# Altium PCB 显示部分.PcbDoc
Units mil, origin at the board's own origin, x right, y up, seen from the top; angles counter-clockwise.
Board outline 6000 x 4000 mil, 2 copper layers (Top Layer, Bottom Layer); 24 components, 45 nets, 175 pads, 41 vias.
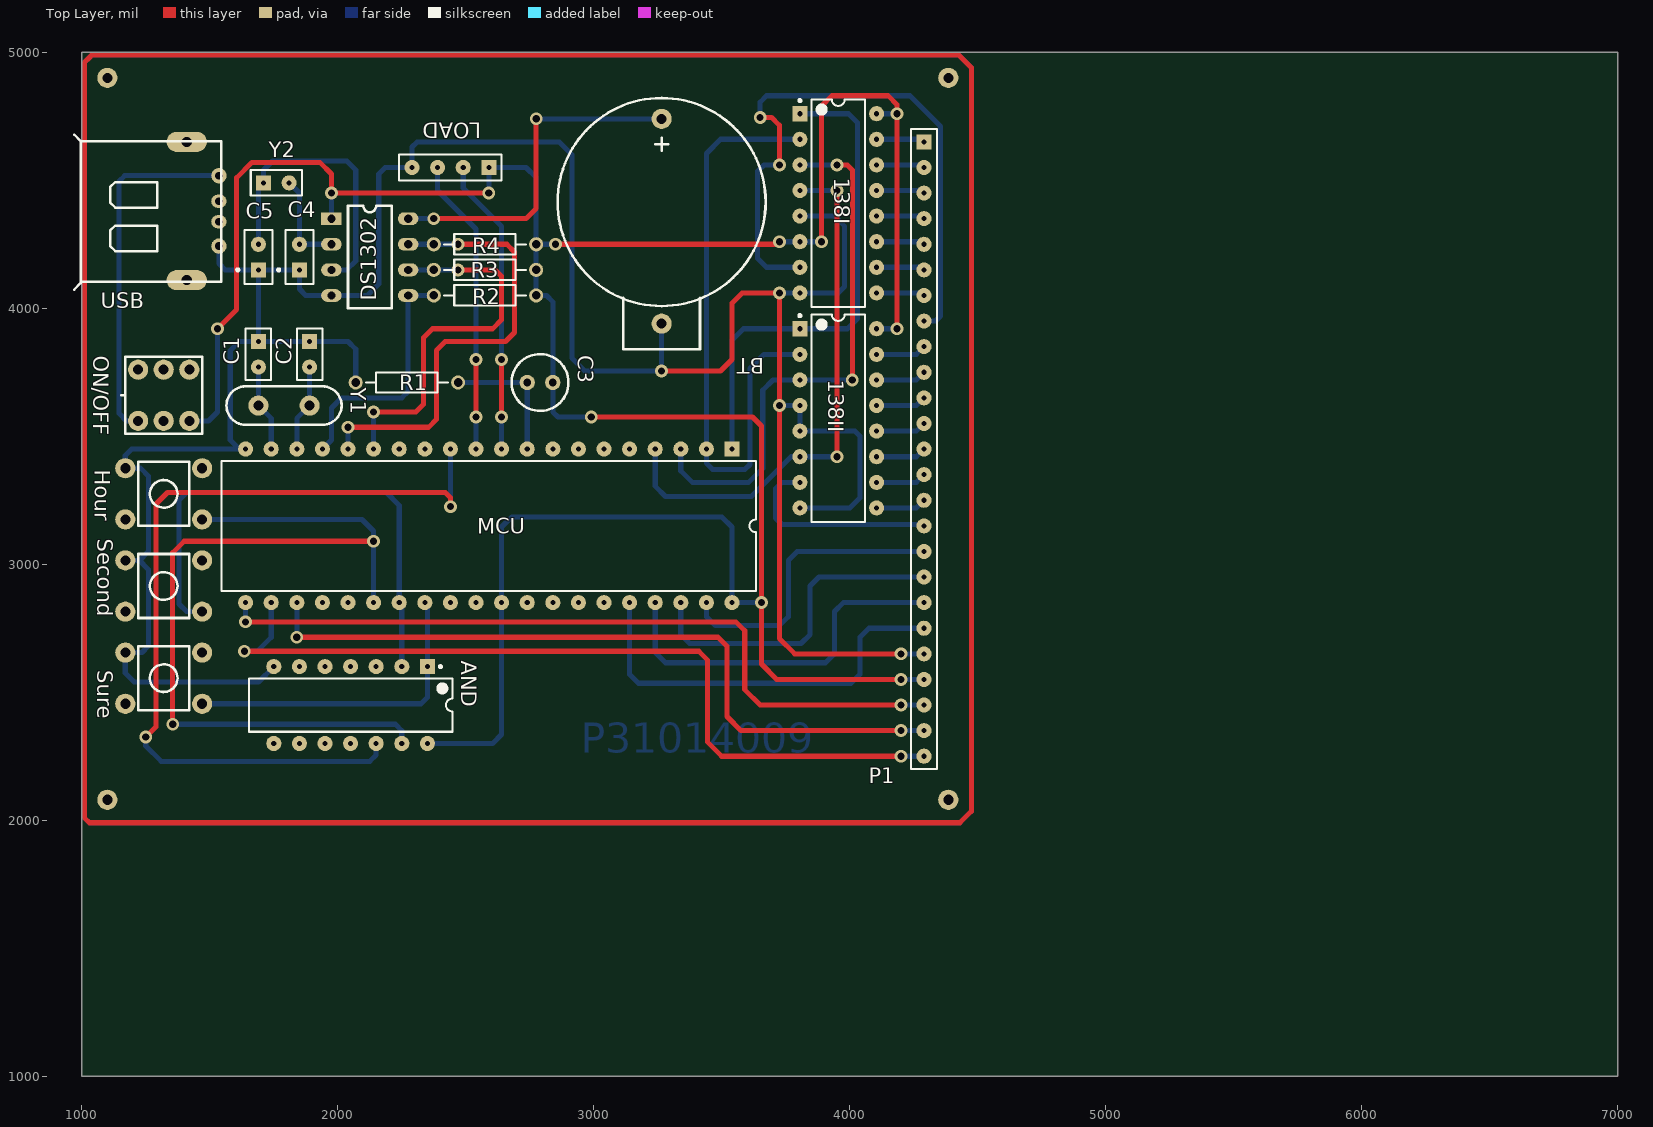
[diagram p0: Top Layer view]
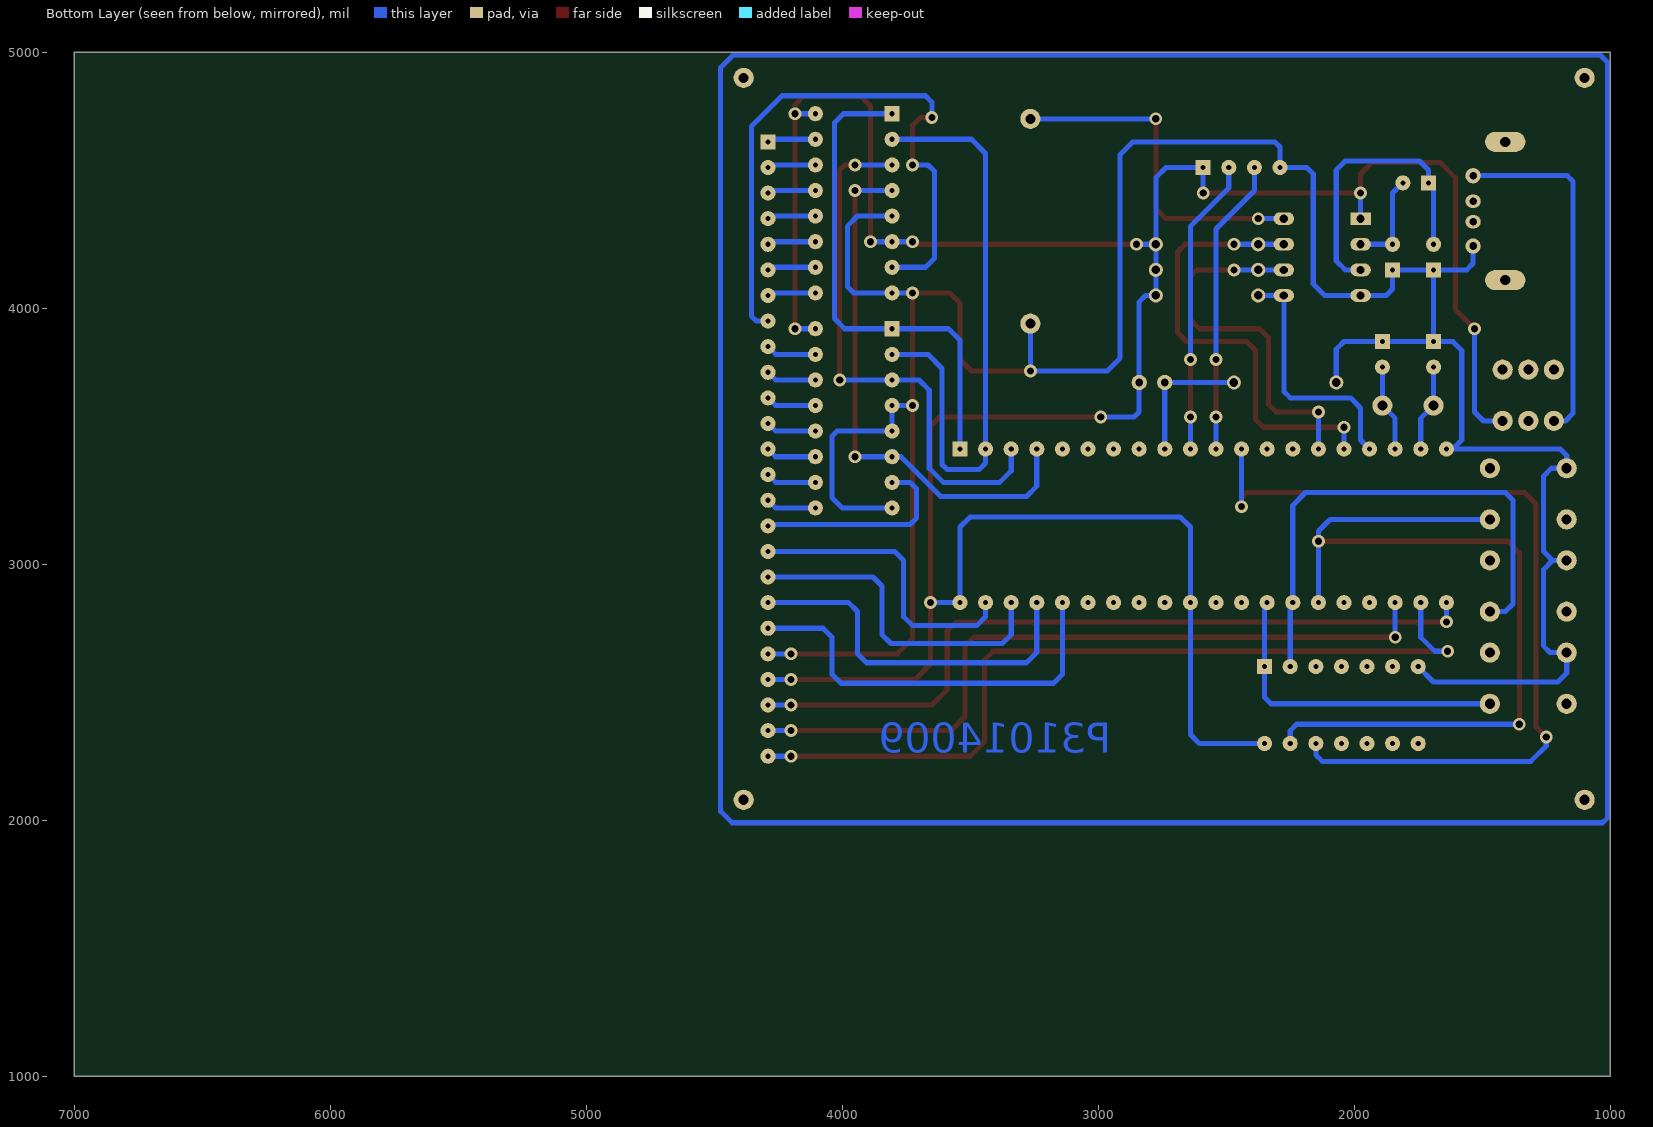
[diagram p1: Bottom Layer view, seen from below]

## Layer stack, top to bottom
Top Layer: signal copper 1.4
Dielectric: dielectric 12.6, FR-4, Dk 4.8
Bottom Layer: signal copper 1.4

## Board outline
1000,1000 7000,1000 7000,5000 1000,5000

## Design rules (kind name [scope] priority, off if disabled: settings)
Clearance [All] p1: gap=10
PolygonConnect [All] p1: connectstyle=Relief reliefconductorwidth=10 reliefentries=4 polygonreliefangle="90 Angle"
RoutingVias [All] p1: holewidth=28 width=50 viastyle="Through Hole" minholewidth=28 minwidth=50 maxholewidth=28 maxwidth=50
SilkscreenOverComponentPads [All] p1: minsilkscreentomaskgap=10
SolderMaskExpansion [All] p1: expansion=4
Width [All] p1: maxlimit=20 minlimit=20 preferedwidth=20 minimp=50.000000 maximp=50.000000 favimp=50.000000
27 further rules are at their usual default settings.

## Components (designator, comment, footprint, x,y, rotation, side; value= is the part's Value field where it differs from the comment)
138I "74ALS138" DIP-16 3955,4410 r0 top
138II "74ALS138" DIP-16 3955,3570 r0 top
AND "74LS11" DIP-14 2050,2450 r270 top
BT "" PCBComponent_1#1 3090,4990 r270 top
C1 "Cap" HDR1X2 1690,3870 r270 top
C2 "Cap" HDR1X2 1890,3870 r270 top
C3 "Cap Pol1" LED 2790,3710 r270 top
C4 "Cap" PIN2 1850,4150 r90 top
C5 "Cap" PIN2 1690,4150 r90 top
DS1302 "" DIP8 1975,4350 r0 top
Hour "" PCBComponent_1#2 2070,3550 r180 top
LOAD "Header 4" HDR1X4 2590,4550 r180 top
MCU "P80C31SBPN" SOT129-1 2590,3150 r180 top
ON/OFF "" PCBComponent_1#3 670,4210 r0 top
P1 "" HDR1X25 4290,4650 r270 top
R1 "Res2" AXIAL-0.4 2270,3710 r0 top
R2 "Res2" AXIAL-0.4 2575,4050 r180 top
R3 "Res2" AXIAL-0.4 2575,4150 r180 top
R4 "Res2" AXIAL-0.4 2575,4250 r180 top
Second "" PCBComponent_1#2 2070,3190 r180 top
Sure "" PCBComponent_1#2 2070,2830 r180 top
USB "USB_M" USB 1250,4370 r180 top
Y1 "XTAL" PCBComponent_1#4 1590,3970 r270 top
Y2 "XTAL" HDR1X2 1710,4490 r0 top

## Footprints (in the part's own frame and the unit in brackets; to place one, negate y for a bottom-side part, rotate by r counter-clockwise, add the part's x,y. Pads: shape width x height; smd on the part's side, far side on the other; paste and mask are expansions set on the pad)
AXIAL-0.4 [mm] "Axial Device, Thru-Hole; 2 Leads; 0.4 in Pin Spacing"
  round 1.4 hole 0.85: 1(-5.08,0) 2(5.08,0)
  silkscreen extent -4.06,-1.02 4.06,1.02
DIP8 [mil]
  rect 80x50 hole 32: 1(0,0)
  oval 80x50 hole 32: 2(0,-100) 3(0,-200) 4(0,-300) 5(300,-300) 6(300,-200) 7(300,-100) 8(300,0)
  silkscreen extent 65,-350 235,50
DIP-14 [mm] "DIP; 14 Leads; Row Spacing 7.62 mm; Pitch 2.54 mm"
  rect 1.5x1.5 hole 0.508: 1(-3.81,7.62)
  round 1.5 hole 0.508: 2(-3.81,5.08) 3(-3.81,2.54) 4(-3.81,0) 5(-3.81,-2.54) 6(-3.81,-5.08) 7(-3.81,-7.62) 8(3.81,-7.62) 9(3.81,-5.08) 10(3.81,-2.54) 11(3.81,0) 12(3.81,2.54) 13(3.81,5.08) 14(3.81,7.62)
  silkscreen extent -3.93,-10.1 2.65,10.1, body extent -3.6,-10.1 3.6,10.1, height 5.08
DIP-16 [mm] "DIP; 16 Leads; Row Spacing 7.62 mm; Pitch 2.54 mm"
  rect 1.5x1.5 hole 0.508: 1(-3.81,8.89)
  round 1.5 hole 0.508: 2(-3.81,6.35) 3(-3.81,3.81) 4(-3.81,1.27) 5(-3.81,-1.27) 6(-3.81,-3.81) 7(-3.81,-6.35) 8(-3.81,-8.89) 9(3.81,-8.89) 10(3.81,-6.35) 11(3.81,-3.81) 12(3.81,-1.27) 13(3.81,1.27) 14(3.81,3.81) 15(3.81,6.35) 16(3.81,8.89)
  silkscreen extent -3.93,-10.3 2.65,10.31, body extent -3.6,-10.28 3.6,10.28, height 5.08
HDR1X2 [mm] "Connector; Header; 2 Position"
  rect 1.5x1.5 hole 0.508: 1(0,0)
  round 1.5 hole 0.508: 2(2.54,0)
  silkscreen extent -1.27,-1.27 3.81,1.27
HDR1X4 [mm] "Connector; Header; 4 Position"
  rect 1.5x1.5 hole 0.508: 1(0,0)
  round 1.5 hole 0.508: 2(2.54,0) 3(5.08,0) 4(7.62,0)
  silkscreen extent -1.27,-1.27 8.89,1.27
HDR1X25 [mm] "Connector; Header; 25 Position"
  rect 1.5x1.5 hole 0.508: 1(0,0)
  round 1.5 hole 0.508: 2(2.54,0) 3(5.08,0) 4(7.62,0) 5(10.16,0) 6(12.7,0) 7(15.24,0) 8(17.78,0) 9(20.32,0) 10(22.86,0) 11(25.4,0) 12(27.94,0) 13(30.48,0) 14(33.02,0) 15(35.56,0) 16(38.1,0) 17(40.64,0) 18(43.18,0) 19(45.72,0) 20(48.26,0) 21(50.8,0) 22(53.34,0) 23(55.88,0) 24(58.42,0) 25(60.96,0)
  silkscreen extent -1.27,-1.27 62.23,1.27
LED [mil]
  round 60 hole 30: 1(0,50) 2(0,-50)
  silkscreen extent -111,-111 111,111
PCBComponent_1#1 [mm]
  round 2 hole 1: 1(6.35,4.445) 2(26.67,4.445)
  silkscreen extent 4.28,-5.88 29.21,14.77
PCBComponent_1#2 [mm]
  round 2 hole 1: 1(15.24,9.525) 2(15.24,4.445) 3(22.86,4.445) 4(22.86,9.525)
  silkscreen extent 16.51,3.81 21.59,10.16
PCBComponent_1#3 [mm]
  round 2 hole 1: 1(13.97,-16.51) 2(16.51,-16.51) 3(19.05,-16.51) 4(19.05,-11.43) 5(16.51,-11.43) 6(13.97,-11.43)
  silkscreen extent 12.32,-17.78 20.32,-10.16
PCBComponent_1#4 [mm]
  round 2 hole 1: 1(8.89,7.62) 2(8.89,2.54)
  silkscreen extent 6.98,-0.63 10.79,10.8
PIN2 [mm] "Photosensitive Diode; 2 Leads"
  rect 1.5x1.5 hole 0.508: 1(0,0)
  round 1.5 hole 0.508: 2(2.54,0)
  silkscreen extent -1.4,-1.4 3.94,2.17
SOT129-1 [mm] "DIP, Plastic; 40 Leads; Row Spacing 15.24 mm; Pitch 2.54 mm"
  rect 1.5x1.5 hole 0.508: 1(-24.13,-7.62)
  round 1.5 hole 0.508: 2(-21.59,-7.62) 3(-19.05,-7.62) 4(-16.51,-7.62) 5(-13.97,-7.62) 6(-11.43,-7.62) 7(-8.89,-7.62) 8(-6.35,-7.62) 9(-3.81,-7.62) 10(-1.27,-7.62) 11(1.27,-7.62) 12(3.81,-7.62) 13(6.35,-7.62) 14(8.89,-7.62) 15(11.43,-7.62) 16(13.97,-7.62) 17(16.51,-7.62) 18(19.05,-7.62) 19(21.59,-7.62) 20(24.13,-7.62) 21(24.13,7.62) 22(21.59,7.62) 23(19.05,7.62) 24(16.51,7.62) 25(13.97,7.62) 26(11.43,7.62) 27(8.89,7.62) 28(6.35,7.62) 29(3.81,7.62) 30(1.27,7.62) 31(-1.27,7.62) 32(-3.81,7.62) 33(-6.35,7.62) 34(-8.89,7.62) 35(-11.43,7.62) 36(-13.97,7.62) 37(-16.51,7.62) 38(-19.05,7.62) 39(-21.59,7.62) 40(-24.13,7.62)
  silkscreen extent -26.5,-6.45 26.5,6.45
USB [mil]
  round 60 hole 30: 1(-285.63,-147.91) 4(-285.63,127.09)
  oval 60x52.13 hole 30: 2(-285.63,-47.91) 3(-285.63,32.09)
  oval 157.48x78.74 hole 39.37: ""(-160,260) ""(-160,-280)
  silkscreen extent -296,-308 279,297

## Part data
BT: library part 干电池, "Battery"
C1 C2 C4 C5: "Capacitor"
C3: "Polarized Capacitor (Radial)"
DS1302 Hour Second Sure: library part Component_1
LOAD: "Header, 4-Pin"
MCU: "80C51 8-Bit Microcontroller Family: 128 B RAM, ROMless, 2.7 V-5.5 V, Low Power, High Speed"
ON/OFF: library part 复位开关
P1: library part "Header 25", "Header, 25-Pin"
R1 R2 R3 R4: "Resistor"
Y1 Y2: "Crystal Oscillator"

## Free pads (board coordinates)
  round 78.74 hole 39.37: 1(1100,4900) 3(1100,2080) 4(4385,2080) 5(4385,4900)

## Via types
v1: diameter 50, hole 28, Top Layer to Bottom Layer, 41 vias

## Nets (pads, with @x,y where several pads share a name; then routed paths per layer and width w, separated by ;. In a path a pad name is that pad's centre, name@x,y a point inside that pad or via, vN(x,y) a via of type N, cw(c..) or ccw(c..) an arc to the next point about the centre after c; other vN are vias at no path point)
A: 138I.1 138II.1 MCU.1 | length 1954.7
  Bottom Layer w20: MCU.1 3540,3875 3585,3920 138II.1 3990,3920 4030,3960 4030,4725 3995,4760 138I.1
B: 138I.2 138II.2 MCU.2 | length 2379.2
  Bottom Layer w20: 138II.2 3665,3820 3610,3765 3610,3390 3590,3370 3465,3370 3440,3395 MCU.2 3440,4605 3495,4660 138I.2
B0: 138I.15 P1.1 | length 175
  Bottom Layer w20: 138I.15 P1.1@4280,4660
B1: 138I.14 P1.2 | length 175
  Bottom Layer w20: 138I.14 P1.2@4280,4560
B2: 138I.13 P1.3 | length 175
  Bottom Layer w20: 138I.13 P1.3@4280,4460
B3: 138I.12 P1.4 | length 175
  Bottom Layer w20: 138I.12 P1.4@4280,4360
B4: 138I.11 P1.5 | length 175
  Bottom Layer w20: 138I.11 P1.5@4280,4260
B5: 138I.10 P1.6 | length 175
  Bottom Layer w20: 138I.10 P1.6@4280,4160
B6: 138I.9 P1.7 | length 175
  Bottom Layer w20: 138I.9 P1.7@4280,4060
B7: 138I.7 P1.8 | length 2497.7
  Top Layer w20: v1(3650,4745) 3695,4745 3725,4715 v1(3725,4560)
  Bottom Layer w20: v1(3650,4745) 3650,4805 3675,4830 4235,4830 4355,4710 4355,3970 4335,3950 P1.8 ; v1@3725,4565 3720,4560 3665,4560 3640,4535 3640,4195 3675,4160 138I.7
B8: 138II.15 P1.9 | length 197.4
  Bottom Layer w20: 138II.15 4260,3820 P1.9
B9: 138II.14 P1.10 | length 197.4
  Bottom Layer w20: 138II.14 4260,3720 P1.10
B10: 138II.13 P1.11 | length 197.4
  Bottom Layer w20: 138II.13 4260,3620 P1.11
B11: 138II.12 P1.12 | length 197.4
  Bottom Layer w20: 138II.12 4260,3520 P1.12
B12: 138II.11 P1.13 | length 197.4
  Bottom Layer w20: 138II.11 4260,3420 P1.13
B13: 138II.10 P1.14 | length 197.4
  Bottom Layer w20: 138II.10 4260,3320 P1.14
B14: 138II.9 P1.15 | length 197.4
  Bottom Layer w20: 138II.9 4260,3220 P1.15
B15: 138II.7 P1.16 | length 812.8
  Bottom Layer w20: 138II.7 3735,3320 3710,3295 3710,3180 3735,3155 4285,3155 P1.16
C: 138I.3 138II.3 MCU.3 | length 2151.3
  Top Layer w20: v1(3950,4560) 3990,4560 4010,4540 v1(4010,3720)
  Bottom Layer w20: MCU.3 3340,3365 3385,3320 3605,3320 3660,3375 3660,3680 3700,3720 138II.3 v1(4010,3720) ; 138I.3 v1(3950,4560)
CLK: MCU.22 P1.25 | length 3293.3
  Top Layer w20: v1(1635,2660) 3410,2660 3445,2625 3445,2305 3500,2250 v1(4200,2250)
  Bottom Layer w20: v1(1635,2660) 1635,2665 1640,2670 1640,2675 1655,2660 1685,2660 1740,2715 MCU.22 ; v1(4200,2250) P1.25
D: 138I.4 138II.6 MCU.4 | length 2120.8
  Top Layer w20: v1(3950,3420) v1(3950,4460)
  Bottom Layer w20: MCU.4 3240,3305 3280,3265 3615,3265 3770,3420 138II.6 v1(3950,3420) ; 138I.4 v1(3950,4460)
GND: 138I.5 138I.8 138II.4 138II.5 138II.8 AND.7 BT.2 C1.1 C2.1 C4.1 C5.1 DS1302.4 Hour.3 LOAD.4 MCU.20 P1.21 R1.1 Second.3 Sure.3 USB.4 | length 11270.9
  Top Layer w20: v1(3265,3755) 3495,3755 3540,3800 3540,4020 3580,4060 v1(3725,4060) v1(3725,3620) 3725,2710 3785,2650 v1(4200,2650)
  Bottom Layer w20: Second.3 1225,3015 ; USB.4 1535.63,4174.37 1560,4150 C5.1 ; MCU.20@1650,3460 MCU.20 ; AND.7 1690,2540 1205,2540 1170,2575 Sure.3 1235,2655 1260,2680 1260,2980 1225,3015 ; R1.1 2070,3840 2040,3870 C2.1 C1.1 ; BT.2 v1(3265,3755) 2965,3755 2915,3805 2915,4600 2865,4650 2310,4650 2290,4630 LOAD.4 2185,4550 2160,4525 2160,4095 2115,4050 DS1302.4 1875,4050 1850,4075 C4.1 C5.1 ; v1(3725,3620) 138II.4 138II.5 4020,3520 4040,3500 4040,3260 4000,3220 138II.8 ; v1(3725,4060) 138I.8 3955,4060 3980,4085 3980,4320 3940,4360 138I.5 ; v1(4200,2650) P1.21 ; 1225,3015 1260,3050 1260,3345 1230,3375 Hour.3 1170,3425 1195,3450 MCU.20 ; MCU.20 1615,3450 1580,3485 1580,3835 1615,3870 C1.1 ; C1.1 C5.1
L1: MCU.37 P1.19 | length 1455.6
  Bottom Layer w20: MCU.37 3240,2655 3280,2615 3905,2615 3940,2650 3940,2815 3975,2850 P1.19
L2: MCU.38 P1.18 | length 1308.5
  Bottom Layer w20: MCU.38 3340,2725 3375,2690 3810,2690 3845,2725 3845,2915 3880,2950 P1.18
L3: MCU.39 P1.17 | length 1168.5
  Bottom Layer w20: MCU.39 3440,2795 3475,2760 3725,2760 3760,2795 3760,3015 3795,3050 P1.17
L4: MCU.36 P1.20 | length 1618.5
  Bottom Layer w20: MCU.36 3140,2570 3175,2535 4005,2535 4040,2570 4040,2715 4075,2750 P1.20
NetBT_1: BT.1 DS1302.8 | length 1356.6
  Top Layer w20: v1(2375,4350) 2735,4350 2775,4390 v1(2775,4740)
  Bottom Layer w20: DS1302.8 v1(2375,4350) ; v1(2775,4740) BT.1
NetC4_2: C4.2 DS1302.2 Y2.2 | length 381.6
  Bottom Layer w20: Y2.2 1850,4450 C4.2 DS1302.2
NetC5_2: C5.2 DS1302.3 Y2.1 | length 1151.8
  Bottom Layer w20: C5.2 1690,4470 Y2.1 1710,4540 1745,4575 2035,4575 2070,4540 2070,4185 2035,4150 DS1302.3
NetON/OFF_1: ON/OFF.1 USB.1 | length 1392.5
  Bottom Layer w20: ON/OFF.1 1175,3560 1145,3590 1145,4495 1167.91,4517.91 USB.1
P9: C3.2 MCU.9 R1.2 | length 530
  Bottom Layer w20: R1.2 C3.2 MCU.9
P12: AND.12 MCU.12 | length 3378.7
  Top Layer w20: v1(1250,2325) 1290,2365 1290,3235 1335,3280 2420,3280 2440,3260 v1(2440,3225)
  Bottom Layer w20: v1(1250,2325) 1250,2290 1310,2230 2125,2230 2150,2255 AND.12 ; v1(2440,3225) MCU.12
P18: C2.2 MCU.18 Y1.1 | length 340.7
  Bottom Layer w20: MCU.18 1840,3570 Y1.1 C2.2
P19: C1.2 MCU.19 Y1.2 | length 355.7
  Bottom Layer w20: C1.2 Y1.2 ; Y1.2@1705,3620 Y1.2 ; MCU.19 1740,3570 Y1.2
P26: AND.13 Hour.1 MCU.26 | length 3397.6
  Top Layer w20: v1(1355,2375) 1355,3045 1400,3090 v1(2140,3090)
  Bottom Layer w20: v1(1355,2375) 2225,2375 2250,2350 AND.13 ; Hour.1 2095,3175 2140,3130 v1(2140,3090) MCU.26
P27: AND.2 MCU.27 Second.1 | length 2034.7
  Bottom Layer w20: Second.1 1410,2815 1380,2845 1380,3250 1410,3280 2190,3280 2240,3230 MCU.27 2250,2840 AND.2
P28: AND.1 MCU.28 Sure.1 | length 1250.4
  Bottom Layer w20: Sure.1 2325,2455 2350,2480 AND.1 MCU.28@2350,2840
P31: 138I.6 138I.16 138II.16 AND.14 C3.1 DS1302.1 LOAD.1 MCU.31 MCU.40 ON/OFF.3 P1.22 R2.1 R3.1 R4.1 | length 11431.5
  Top Layer w20: v1(1530,3920) 1605,3995 1605,4510 1665,4570 1930,4570 1975,4525 v1(1975,4450) v1(2590,4450) ; v1(2850,4250) v1@3710,4250 ; v1(2990,3575) 3620,3575 3655,3540 v1(3655,2850) 3655,2610 3715,2550 v1(4200,2550) ; v1(3890,4260) 3890,4790 3930,4830 4150,4830 4185,4795 v1(4185,4760) v1(4185,3920)
  Bottom Layer w20: ON/OFF.3 1495,3560 1530,3595 v1(1530,3920) ; DS1302.1 v1(1975,4450) ; AND.14 2605,2300 2640,2335 MCU.31 2640,3145 2680,3185 3500,3185 3540,3145 MCU.40 v1(3655,2850) ; v1(2590,4450) LOAD.1 2735,4550 2775,4510 R4.1 ; v1(2850,4250) R4.1 ; v1(2990,3575) 2860,3575 2840,3595 C3.1 2840,4025 2815,4050 R2.1 R3.1 R4.1 ; v1(3725,4260) 138I.6 ; 138I.6@3795,4250 138I.6 ; v1(3890,4260) 138I.6 ; 138II.16 v1(4185,3920) ; 138I.16 v1(4185,4760) ; v1(4200,2550) P1.22
R1: MCU.21 P1.23 | length 3004.4
  Top Layer w20: v1(1640,2775) 3555,2775 3590,2740 3590,2510 3650,2450 v1(4200,2450)
  Bottom Layer w20: v1@1640,2765 v1(1640,2775) MCU.21 ; v1(4200,2450) P1.23
RST: DS1302.5 MCU.17 R2.2 | length 976.4
  Bottom Layer w20: MCU.17 1975,3485 1975,3610 2015,3650 2250,3650 2275,3675 DS1302.5 R2.2
RXD: LOAD.2 MCU.10 | length 1162.1
  Top Layer w20: v1(2640,3575) v1(2640,3800)
  Bottom Layer w20: LOAD.2 2490,4470 2640,4320 v1(2640,3800) ; MCU.10 v1(2640,3575)
SCLK: DS1302.7 MCU.16 R4.2 | length 1788.8
  Top Layer w20: v1(2040,3535) 2355,3535 2385,3565 2385,3835 2420,3870 2655,3870 2690,3905 2690,4220 2660,4250 v1(2470,4250)
  Bottom Layer w20: MCU.16 v1(2040,3535) ; DS1302.7 R4.2 v1(2470,4250)
SDA: DS1302.6 MCU.15 R3.2 | length 1491.8
  Top Layer w20: v1(2140,3595) 2305,3595 2335,3625 2335,3885 2370,3920 2605,3920 2640,3955 2640,4125 2615,4150 v1(2470,4150)
  Bottom Layer w20: MCU.15 v1(2140,3595) ; DS1302.6 R3.2 v1(2470,4150)
STB: MCU.23 P1.24 | length 2901.4
  Top Layer w20: v1(1840,2715) 3485,2715 3520,2680 3520,2405 3575,2350 4195,2350 4200,2355 v1(4200,2350)
  Bottom Layer w20: v1@1840,2725 MCU.23 ; v1(4200,2350) 4200,2355 4205,2350 P1.24
TXD: LOAD.3 MCU.11 | length 1162.1
  Top Layer w20: v1(2540,3575) v1(2540,3800)
  Bottom Layer w20: LOAD.3 2390,4460 2540,4310 v1(2540,3800) ; MCU.11 v1(2540,3575)
pads on no net: AND.3 AND.4 AND.5 AND.6 AND.8 AND.9 AND.10 AND.11 Hour.2 Hour.4 MCU.5 MCU.6 MCU.7 MCU.8 MCU.13 MCU.14 MCU.24 MCU.25 MCU.29 MCU.30 MCU.32 MCU.33 MCU.34 MCU.35 ON/OFF.2 ON/OFF.4 ON/OFF.5 ON/OFF.6 Second.2 Second.4 Sure.2 Sure.4 USB. USB.2 USB.3
copper on no net: | length 25690.1
  Top Layer w20: 1010,2010 1010,4960 1030,4980 1040,4990 4425,4990 4475,4940 4475,2035 4430,1990 1030,1990 1010,2010
  Bottom Layer w20: 1010,2010 1010,4895 1010,4960 1040,4990 4425,4990 4475,4940 4475,2035 4430,1990 1685,1990 1030,1990 1010,2010

## Other copper
Bottom Layer:
  text "P31014009" at 2950,2225 h200